# Altium PCB TVCPCB.PcbDoc
Units mil, origin at the board's own origin, x right, y up, seen from the top; angles counter-clockwise.
Board outline 2263.78 x 3435 mil, 2 copper layers (Top Layer, Bottom Layer); 11 components, 14 nets, 86 pads, 1 vias.
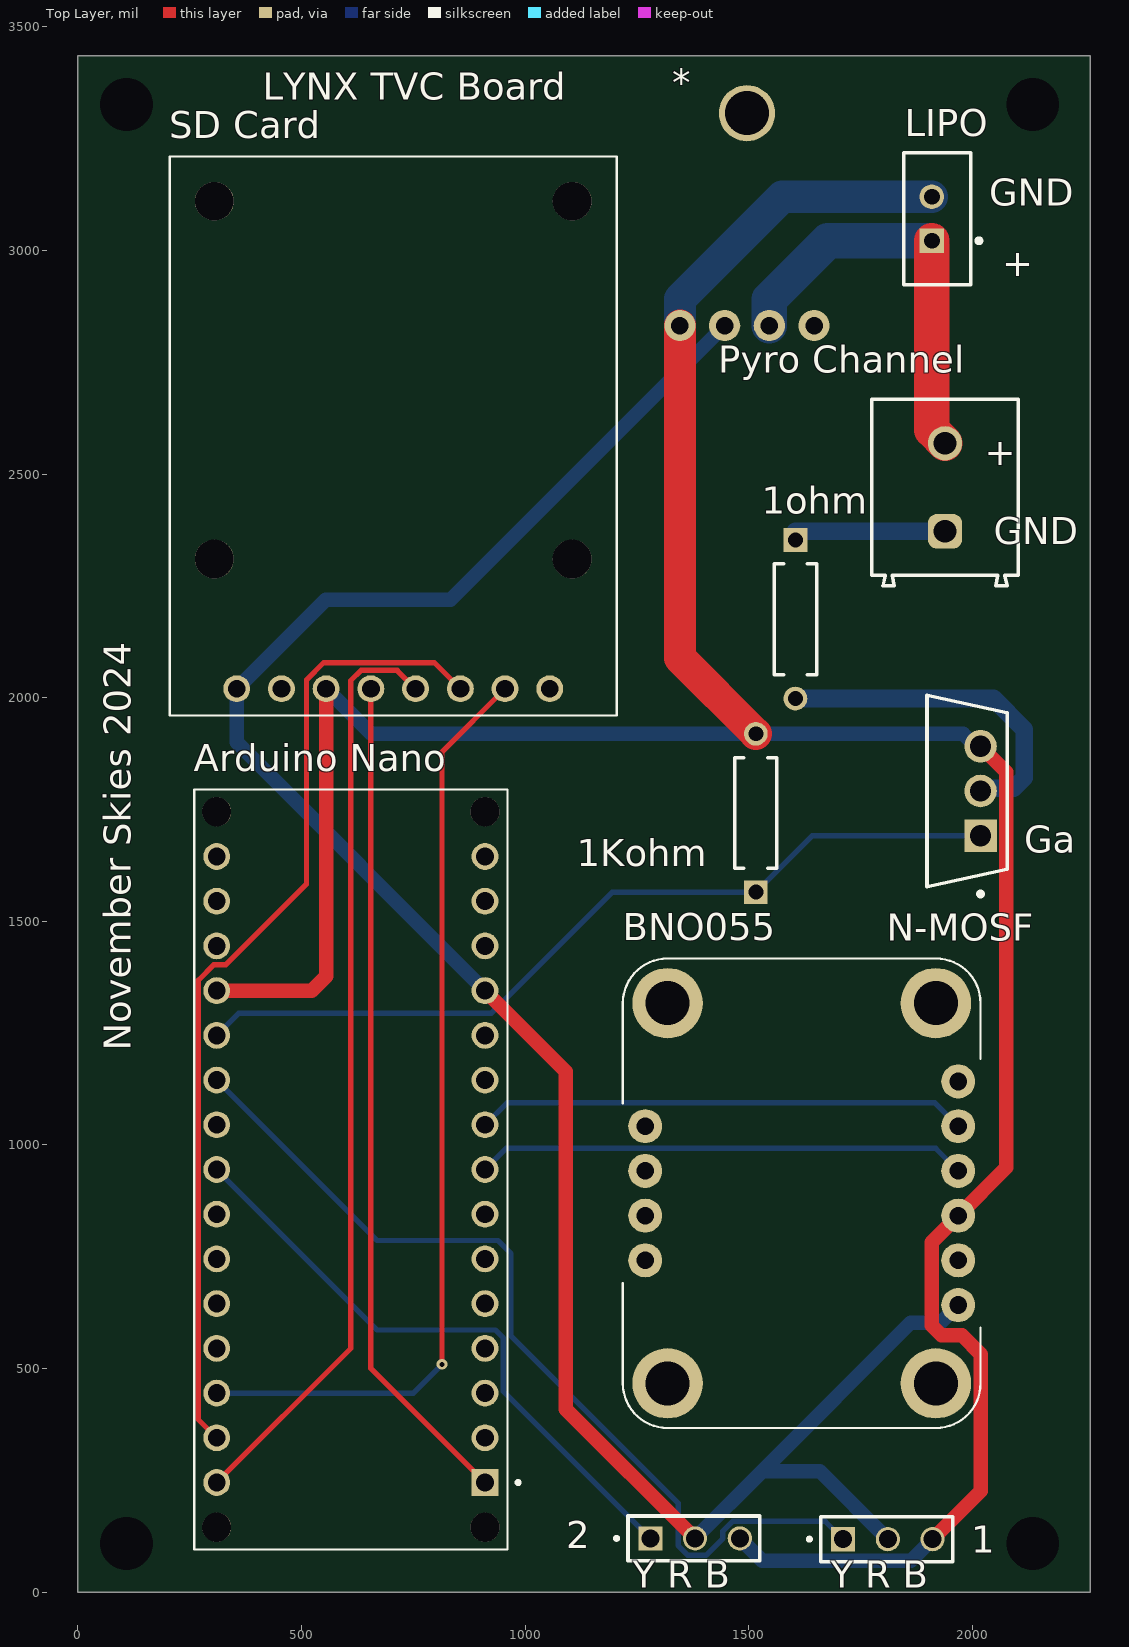
[diagram p0: Top Layer view]
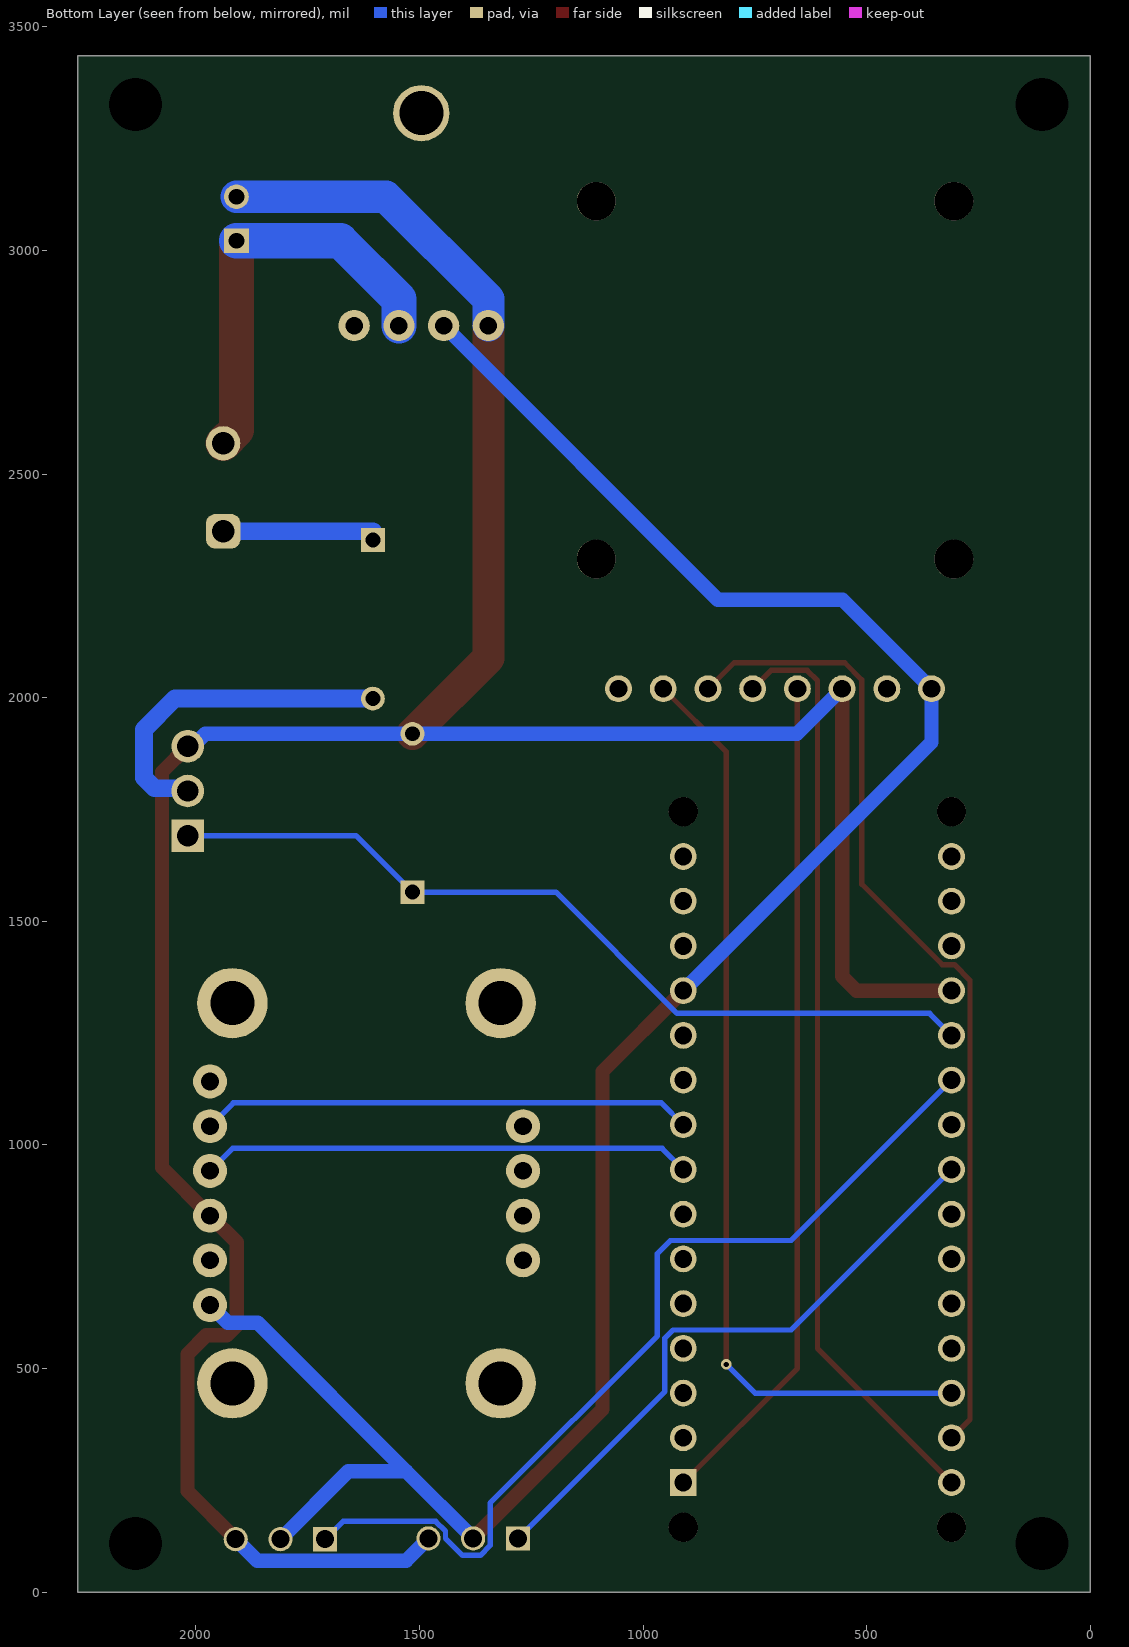
[diagram p1: Bottom Layer view, seen from below]

## Layer stack, top to bottom
Top Solder: solder mask 0.4, Solder Resist, Dk 3.5
Top Layer: signal copper 1.4
Dielectric 1: dielectric 12.6, FR-4, Dk 4.8
Bottom Layer: signal copper 1.4
Bottom Solder: solder mask 0.4, Solder Resist, Dk 3.5

## Board outline
0,0 0,3435 2263.78,3435 2263.78,0

## Design rules (kind name [scope] priority, off if disabled: settings)
BoardOutlineClearance [All] p1: gap=7.87 ignorepadtopadclearanceinfootprint=FALSE
Clearance [All] p1: gap=5 ignorepadtopadclearanceinfootprint=FALSE except(9.84: Arc-Hole Track-Hole SMDPad-Hole THPad-Hole Via-Hole Fill-Hole Poly-Hole Region-Hole Text-Hole)
ComponentClearance [All] p1: gap=5 collisioncheckmode=3 verticalgap=5 showdistances=TRUE
DiffPairsRouting [All] p1: maxlimit=10 minlimit=5 mostfreqgap=5 toplayer_minwidth=5 toplayer_maxwidth=1000 toplayer_prefwidth=5 bottomlayer_minwidth=5 bottomlayer_maxwidth=1000 bottomlayer_prefwidth=5 maxuncoupledlength=500
Height [All] p1: minheight=0 maxheight=71497.94 prefheight=500
HoleSize [All] p1: absolutevalues=TRUE maxlimit=248.03 minlimit=11.81 maxpercent=80.000 minpercent=20.000
HoleToHoleClearance [All] p1: gap=9.84 allowstackedmicrovias=FALSE
MinimumAnnularRing [All] p1: minimumring=3
MinimumSolderMaskSliver [All] p1: minsoldermaskwidth=0
PlaneClearance [All] p1: clearance=5
PlaneConnect PlaneConnectPowerPads [InPadClass('PowerPads')] p1: planeconnectstyle=Direct reliefexpansion=20 reliefentries=4 reliefconductorwidth=10 reliefairgap=10
PlaneConnect [All] p2: pad.planeconnectstyle=Relief pad.reliefexpansion=11.81 pad.reliefentries=4 pad.reliefconductorwidth=5 pad.reliefairgap=5 via.planeconnectstyle=Direct via.reliefexpansion=11.81 via.reliefentries=4 via.reliefconductorwidth=5 via.reliefairgap=5
PolygonConnect PolygonConnectPowerPads [All vs (InPadClass('PowerPads'))] p1: connectstyle=Direct reliefconductorwidth=10 reliefentries=4 polygonreliefangle="90 Angle" airgapwidth=10
PolygonConnect [All] p2: thpad.connectstyle=Relief thpad.reliefconductorwidth=5 thpad.reliefentries=4 thpad.polygonreliefangle="90 Angle" thpad.airgapwidth=5 smdpad.connectstyle=Relief smdpad.reliefconductorwidth=5 smdpad.reliefentries=4 smdpad.polygonreliefangle="90 Angle" smdpad.airgapwidth=5 via.connectstyle=Direct via.reliefconductorwidth=5 via.reliefentries=4 via.polygonreliefangle="90 Angle" via.airgapwidth=5
RoutingVias [All] p1: holewidth=11.81 width=23.62 viastyle="Through Hole" minholewidth=11.81 minwidth=23.62 maxholewidth=23.62 maxwidth=259.84
SilkToSilkClearance [All] p1: silktosilkclearance=0
SilkToSolderMaskClearance [IsPad] p1: minsilkscreentomaskgap=5 clearancetoexposedcopper=TRUE
SolderMaskExpansion [All] p1: expansion=2.95 istentingtop=FALSE
SupplyNets "Schematic Supply Nets_3" [InNet('7.2')] p1: voltage=0.000
SupplyNets "Schematic Supply Nets_2" [InNet('+5')] p2: voltage=0.000
SupplyNets "Schematic Supply Nets_1" [InNet('GND')] p3: voltage=0.000
SupplyNets "Schematic Supply Nets" [InNet('VCC')] p4: voltage=0.000
UnRoutedNet [All] p1: checkbadconnections=TRUE
Width "Schematic Width Constraint_2" [InNet('7.2')] p1: maxlimit=79 minlimit=79 preferedwidth=79 minimp=50.000000 maximp=50.000000 favimp=50.000000
Width "Schematic Width Constraint_1" [InNet('+5')] p2: maxlimit=32 minlimit=30 preferedwidth=32 minimp=50.000000 maximp=50.000000 favimp=50.000000
Width "Schematic Width Constraint" [InNet('GND')] p3: maxlimit=32 minlimit=30 preferedwidth=32 bottomlayer_minwidth=32 minimp=50.000000 maximp=50.000000 favimp=50.000000
Width [All] p4: maxlimit=1000 minlimit=5 preferedwidth=12 minimp=50.000000 maximp=50.000000 favimp=50.000000
19 further rules are at their usual default settings.

## Components (designator, comment, footprint, x,y, rotation, side; value= is the part's Value field where it differs from the comment)
1 "Servo1" SAMTEC_TSW-203-16-T-S 1711.02,118.11 r0 top (schematic designator "Servo 1")
1Kohm "MFR-25FBF52-100R" RESA60-630X240 1515.75,1742.13 r90 top value=1k
1ohm "MFR-25FBF52-100R" RESA60-630X240 1604.33,2175.2 r270 top value=1
2 "Servo2" SAMTEC_TSW-203-16-T-S 1280,120 r0 top (schematic designator "Servo 2")
* "MPM3610 adafruit V4" V4BuckConverter-Footprint-1 1496.06,2832.09 r0 top
"Arduino Nano" "ABX00028" MODULE_ABX00028 610.24,944.88 r90 top
BNO055 "2472" MODULE_2472 1618.5,891.73 r90 top
LIPO "Battery connector" FP-B2B-EH-A_LF_SN-MFG 1921.26,3070.87 r90 top (schematic designator J?)
N-MOSF "IRLB4132PBF" FP-PG-TO220-3-MFG 1988.19,1791.34 r180 top (schematic designator Q?)
"Pyro Channel" "691213710002" 691213710002 1938.98,2470.47 r90 top
"SD Card" "254" MODULE_254 705,2585 r270 top

## Footprints (in the part's own frame and the unit in brackets; to place one, negate y for a bottom-side part, rotate by r counter-clockwise, add the part's x,y. Pads: shape width x height; smd on the part's side, far side on the other; paste and mask are expansions set on the pad)
691213710002 [mm] "5,00mm - modular - green - Horizontal entry with rising cage clamp -  10,0mm height - 02p"
  rrect50% 1.95x1.95 hole 1.3: 1(-2.5,0)
  round 1.95 hole 1.3: 2(2.5,0)
  silkscreen extent -5.6,-4.15 5,4.15, body extent -5.6,-4.15 5,4.15, height 10.05
FP-B2B-EH-A_LF_SN-MFG [mm]
  rect 1.4x1.4 hole 0.9 paste-2539.97 mask+0: 1(-1.25,0.3)
  round 1.4 hole 0.9 paste-2539.97 mask+0: 2(1.25,0.3)
  silkscreen extent -3.75,-2.5 3.75,1.9, body extent -3.85,-2 3.85,2, height 0.25
FP-PG-TO220-3-MFG [mm]
  rect 1.85x1.85 hole 1.2 paste-2539.97 mask+0: 1(-0.768,2.54)
  round 1.85 hole 1.2 paste-2539.97 mask+0: 2(-0.768,0) 3(-0.768,-2.54)
  silkscreen extent -2.28,-5.45 2.28,5.97, body extent -2.37,-5.55 2.37,5.55, height 0.25
MODULE_254 [mm]
  round 1.53 hole 1.02: 1(14.351,8.89) 2(14.351,6.35) 3(14.351,3.81) 4(14.351,1.27) 5(14.351,-1.27) 6(14.351,-3.81) 7(14.351,-6.35) 8(14.351,-8.89)
  round 2.2 hole 2.2 unplated: ""(-13.335,10.16) ""(-13.335,-10.16) ""(6.985,10.16) ""(6.985,-10.16)
  silkscreen extent -15.88,-12.7 15.88,12.7
MODULE_2472 [mm]
  round 1.93 hole 1: 1(-6.35,-8.89) 2(-3.81,-8.89) 3(-1.27,-8.89) 4(1.27,-8.89) 5(3.81,-8.89) 6(6.35,-8.89) 7(3.81,8.89) 8(1.27,8.89) 9(-1.27,8.89) 10(-3.81,8.89)
  round 4 hole 2.5: SH1(-10.795,-7.62) SH2(10.795,-7.62) SH3(10.795,7.62) SH4(-10.795,7.62)
  silkscreen extent -13.34,-10.16 13.34,10.16, body extent -13.33,-10.16 13.34,10.16, height 4.23
MODULE_ABX00028 [mil]
  rect 60x60 / inner round 60 / far side rect 60x60 hole 40: 1(-700,-300)
  round 60 hole 40: 2(-600,-300) 3(-500,-300) 4(-400,-300) 5(-300,-300) 6(-200,-300) 7(-100,-300) 8(0,-300) 9(100,-300) 10(200,-300) 11(300,-300) 12(400,-300) 13(500,-300) 14(600,-300) 15(700,-300) 16(700,300) 17(600,300) 18(500,300) 19(400,300) 20(300,300) 21(200,300) 22(100,300) 23(0,300) 24(-100,300) 25(-200,300) 26(-300,300) 27(-400,300) 28(-500,300) 29(-600,300) 30(-700,300)
  round 65 hole 65 unplated: ""(-800,-300) ""(-800,300) ""(800,-300) ""(800,300)
  silkscreen extent -850,-378 850,350, body extent -895,-350 850,350, height 236
RESA60-630X240 [mm] "Axial Resistor, 2-Leads, Dia 2.4mm, Body Length 6.3mm"
  rect 1.35x1.35 hole 0.85: 1(-4.5,0)
  round 1.35 hole 0.85: 2(4.5,0)
  silkscreen extent -3.15,-1.2 3.15,1.2, body extent -4.77,-1.19 4.77,1.2, height 2.4
SAMTEC_TSW-203-16-T-S [mm]
  rect 1.37x1.37 hole 1.02: 01(0,0)
  round 1.37 hole 1.02: 02(2.54,0) 03(5.08,0)
  silkscreen extent -2.02,-1.27 6.22,1.27
V4BuckConverter-Footprint-1 [mil]
  round 70 / inner round 0 / far side round 70 hole 39.37: 1(-150,0) 2(-50,0) 3(50,0) 4(150,0)
  round 125.98 / inner round 0 / far side round 125.98 hole 98.43: 5(0,475)

## Part data
1 2: library part CMP-013-000000-2, Package=None, Availability=Unavailable, Component Type=Standard, Design Item ID=TSW-203-16-T-S, MP=TSW-203-16-T-S, Pin Count=3, Price=None, Source=TSW-203-16-T-S.SchLib
1Kohm 1ohm: library part CMP-009-00046-4, "Axial Resistor, 100 Ohm, +/- 1%, 0.25 W, -55 to 155 degC, 2-Pin THD, RoHS, Bulk", Case/Package=Axial, Manufacturer=Yageo, Max Operating Temperature=155°C, Min Operating Temperature=-55°C, Package Description="2-Pin Axial Lead, Dia 2.4 mm, Body Length 6.3 mm", Package Quantity=200, Package Reference=MFR-25, Power=250mW, Tolerance=1%, Voltage Rating=250V, Composition=CarbonFilm, Datasheet URL=http://www.yageo.com/documents/recent/Yageo%20LR_MFR_2013.pdf, Datasheet Version=Apr-13, Manufacturer URL=http://www.yageo.com/, Mounting Technology=TH, Packaging=Bulk, RoHS Compliant=True
*: library part CMP-019-00049-1, "5V buck converter", Max Supply Voltage=21V, Output Current=1.2A, Output Voltage=5V, Pins=4, RoHS Compliant=Yes
"Arduino Nano": library part CMP-003-000000-1, "Arduinoâ€™s 5V compatible board in the smallest available form factor: 45x18mm!", Package=None, Availability="Not in stock", Check_prices=https://www.snapeda.com/parts/Arduino%20Nano%20Every/Arduino/view-part/?ref=eda, Component Type=Standard, Design Item ID=ABX00028, MF=Arduino, MP="Arduino Nano Every", Pin Count=30, Price=None, SnapEDA_Link=https://www.snapeda.com/parts/Arduino%20Nano%20Every/Arduino/view-part/?ref=snap, Source=ABX00028.SchLib
BNO055: library part CMP-005-000000-1, "Adafruit 9-DOF Absolute Orientation IMU Fusion Breakout - BNO055", Package="Non-Standard Adafruit", Check_prices=https://www.snapeda.com/parts/2472/Adafruit+Industries/view-part/?ref=eda, Component Type=Standard, Design Item ID=2472, MF=Adafruit, MP=2472, Pin Count=10, SnapEDA_Link=https://www.snapeda.com/parts/2472/Adafruit+Industries/view-part/?ref=snap, Source=2472.SchLib
LIPO: library part CMP-17439-000026-1, "CONN HEADER VERT 2POS 2.5MM", Color=Natural, Contact Resistance=20mR, Current Rating=3A, Housing Color=White, Max Operating Temperature=85°C, Max Voltage Rating (AC)=250V, Min Operating Temperature=-25°C, Connector Type=Plug, Contact Material="Copper Alloy", Contact Mating Length=0.13inch, Contact Plating=Tin, Contact Type="Male Pin", Depth=3.8mm, Fastening Type=Detent, Gender=Male, Housing Material=Nylon, Lead Free="Lead Free", Length=7.5mm, Max Current Rating=3A, Mount="Through Hole", Number of Contacts=2, Number of Positions=2, Number of Rows=1, Orientation=Straight, Packaging=Bulk, Pitch=2.5mm, Series=EH, Termination=Press-Fit, Voltage Rating=250V
N-MOSF: library part CMP-32901-000019-2, "MOSFET N-CH 30V 78A TO220", Case/Package=TO-220-3, Continuous Drain Current (ID)=78A, Drain to Source Voltage (Vdss)=30V, Input Capacitance=5.11nF, Max Operating Temperature=175°C, Max Power Dissipation=140W, Min Operating Temperature=-55°C, Lead Free="Lead Free", Mount="Through Hole", Packaging=Rail/Tube, Rds On Max=3.5mR
"Pyro Channel": library part CMP-1502-02526-2, Color=Green, Current=10A, Max Operating Temperature=105°C, Min Operating Temperature=-40°C, Voltage=300V, Contact Material=Brass, Contact Plating=Tin, Current Rating=10A, Height=10mm, Housing Material=Nylon, Lead Pitch=5mm, Length=8.3mm, Mount="Through Hole", NexarPartId=8917718, Number of Contacts=2, Number of Levels=1, Number of Pins=2, Number of Positions Per Level=2, Packaging=Box, Pitch=5.0038mm, Plating="Brass, Steel", REACH SVHC=Unknown, RoHS=Compliant, Stripping Length=-7mm, Termination=Screw, Voltage Rating=300V, Width=10.6mm, Wire Gauge (Max)=26AWG, Wire Gauge (Min)=16AWG, Wire/Cable Gauge=26AWG
"SD Card": library part CMP-007-000000-1, "MicroSD card breakout board+", Package="Keystone Electronics", Availability="In Stock", Check_prices=https://www.snapeda.com/parts/254/Adafruit+Industries/view-part/?ref=eda, Component Type=Standard, Design Item ID=254, MF="Keystone Electronics", MP=254, Pin Count=8, Price=None, Purchase-URL=https://pricing.snapeda.com/search/part/254/?ref=eda, SnapEDA_Link=https://www.snapeda.com/parts/254/Adafruit+Industries/view-part/?ref=snap, Source=254.SchLib

## Free pads (board coordinates)
  round 60 hole 118.1: 7(108.27,3326.77) 9(108.27,108.27) 10(2135,108.27) MH(2135,3326.77)

## Via types
v1: diameter 23.62, hole 11.81, Top Layer to Bottom Layer, 1 vias

## Nets (pads, with @x,y where several pads share a name; then routed paths per layer and width w, separated by ;. In a path a pad name is that pad's centre, name@x,y a point inside that pad or via, vN(x,y) a via of type N, cw(c..) or ccw(c..) an arc to the next point about the centre after c; other vN are vias at no path point)
7.2: "Pyro Channel.2" *.3 LIPO.1 | length 941.4
  Top Layer w79: LIPO.1 1909.45,2598.43 1938.98,2568.9
  Bottom Layer w79: *.3 1546.06,2891.06 1676.65,3021.65 LIPO.1
+5: 1.02 2.02 "Arduino Nano.12" "SD Card.8" *.2 BNO055.1 | length 4900.6
  Top Layer w32: 910.24,1344.88 1091,1164.12 1091,409 2.02
  Bottom Layer w32: 910.24,1344.88 355,1900.12 355,2020 554,2219 832.98,2219 *.2 ; 2.02 1530,270 ; 1.02 1659.13,270 1530,270 ; BNO055.1 1928.77,602 1862,602 1530,270
CLK: "Arduino Nano.1" "SD Card.5" | length 1880.8
  Top Layer w12: 655,2020 655,500.12 910.24,244.88
GND: 1.03 1Kohm.2 2.03 "Arduino Nano.19" "SD Card.6" *.1 BNO055.3 LIPO.2 N-MOSF.3 | length 6573.5
  Top Layer w32: 310.24,1344.88 523,1344.88 555,1376.88 555,2020 ; 1.03 2019,226.09 2019,532 1977,574 1931,574 1909,596 1909,782.23 BNO055.3 2076,949.23 2076,1833.74 N-MOSF.3
  Top Layer w72: *.1 1346.06,2088.98 1Kohm.2
  Bottom Layer w32: 555,2020 655.71,1919.29 1Kohm.2 1979.4,1919.29 2007.36,1891.34 N-MOSF.3 ; 2.03 1530,70 1862.91,70 1.03
  Bottom Layer w72: *.1 1346.06,2891.34 1574.8,3120.08 LIPO.2
MISO: "Arduino Nano.30" "SD Card.4" | length 2088.9
  Top Layer w12: 310.24,244.88 610,544.65 610,2038 633.12,2061.12 713.88,2061.12 755,2020
MOSI: "Arduino Nano.29" "SD Card.3" | length 2212.1
  Top Layer w12: 310.24,344.88 269,386.12 269,1368 304,1403 331,1403 511,1583 511,2040 549.12,2078.12 796.88,2078.12 855,2020
Net1ohm_1: 1ohm.1 "Pyro Channel.1" | length 334.6
  Bottom Layer w40: 1ohm.1@1604.33,2372.05 1711.84,2372.05 1938.98,2372.05
Net1ohm_2: 1ohm.2 N-MOSF.2 | length 758.6
  Bottom Layer w40: 1ohm.2 2047.24,1998.03 2116.14,1929.13 2116.14,1820.87 2092.71,1797.43 2024.5,1797.43 N-MOSF.2
PYRO: 1Kohm.1 "Arduino Nano.20" N-MOSF.1 | length 1893.1
  Bottom Layer w12: 310.24,1244.88 359.35,1294 924,1294 1194.96,1564.96 1Kohm.1 1642.13,1691.34 N-MOSF.1
SCL: "Arduino Nano.9" BNO055.5 | length 1100.3
  Bottom Layer w12: 910.24,1044.88 959.35,1094 1916.24,1094 BNO055.5
SD-CS: "Arduino Nano.28" "SD Card.2" | length 2099.7
  Top Layer w12: v1(814,509) 814,1879 955,2020
  Bottom Layer w12: 310.24,444.88 749.88,444.88 v1(814,509)
SDA: "Arduino Nano.8" BNO055.4 | length 1098.6
  Bottom Layer w12: 910.24,944.88 957.35,992 1918.24,992 BNO055.4
"Servo 1": 1.01 "Arduino Nano.21" | length 2061.9
  Bottom Layer w12: 310.24,1144.88 669.12,786 939,786 968.24,756.76 968.24,572.76 1342,199 1342,104 1364,82 1404.03,82 1442.03,120 1442.03,136 1464.03,158 1671.13,158 1.01
"Servo 2": 2.01 "Arduino Nano.23" | length 1381.3
  Bottom Layer w12: 310.24,944.88 669.12,586 933.24,586 951.24,568 951.24,448.76 2.01
pads on no net: "Arduino Nano.2" "Arduino Nano.3" "Arduino Nano.4" "Arduino Nano.5" "Arduino Nano.6" "Arduino Nano.7" "Arduino Nano.10" "Arduino Nano.11" "Arduino Nano.13" "Arduino Nano.14" "Arduino Nano.15" "Arduino Nano.16" "Arduino Nano.17" "Arduino Nano.18" "Arduino Nano.22" "Arduino Nano.24" "Arduino Nano.25" "Arduino Nano.26" "Arduino Nano.27" "Arduino Nano." "SD Card.1" "SD Card.7" "SD Card." *.4 *.5 BNO055.2 BNO055.6 BNO055.7 BNO055.8 BNO055.9 BNO055.10 BNO055.SH1 BNO055.SH2 BNO055.SH3 BNO055.SH4

## Silkscreen, mask and mechanical layers (free items; w line width, h text height)
Top Overlay:
  text "LYNX TVC Board" at 413.54,3336.77 h60
  text "GND" at 2037.56,3100.55 h60
  text "+" at 2067.09,2942.92 h60
  text "+" at 2027.72,2519.69 h60
  text "GND" at 2047.4,2342.68 h60
  text "Ga" at 2116.3,1653.7 h60
  text "November Skies 2024" at 117.95,1210.79 h60 r90
  text "Y R B" at 1240.32,10 h60
  text "Y R B" at 1683.23,10 h60
Mechanical 1:
  the board outline again, w10